# Altium PCB 主板-双BH(1).PcbDoc (part 6 of 13)
Units mm, origin at the board's own origin, x right, y up, seen from the top; angles counter-clockwise.
Board outline 97.69 x 103.45 mm, 2 copper layers (Top Layer, Bottom Layer); 78 components, 75 nets, 243 pads, 279 vias.
Unrouted connection lines stored in the file: 7.
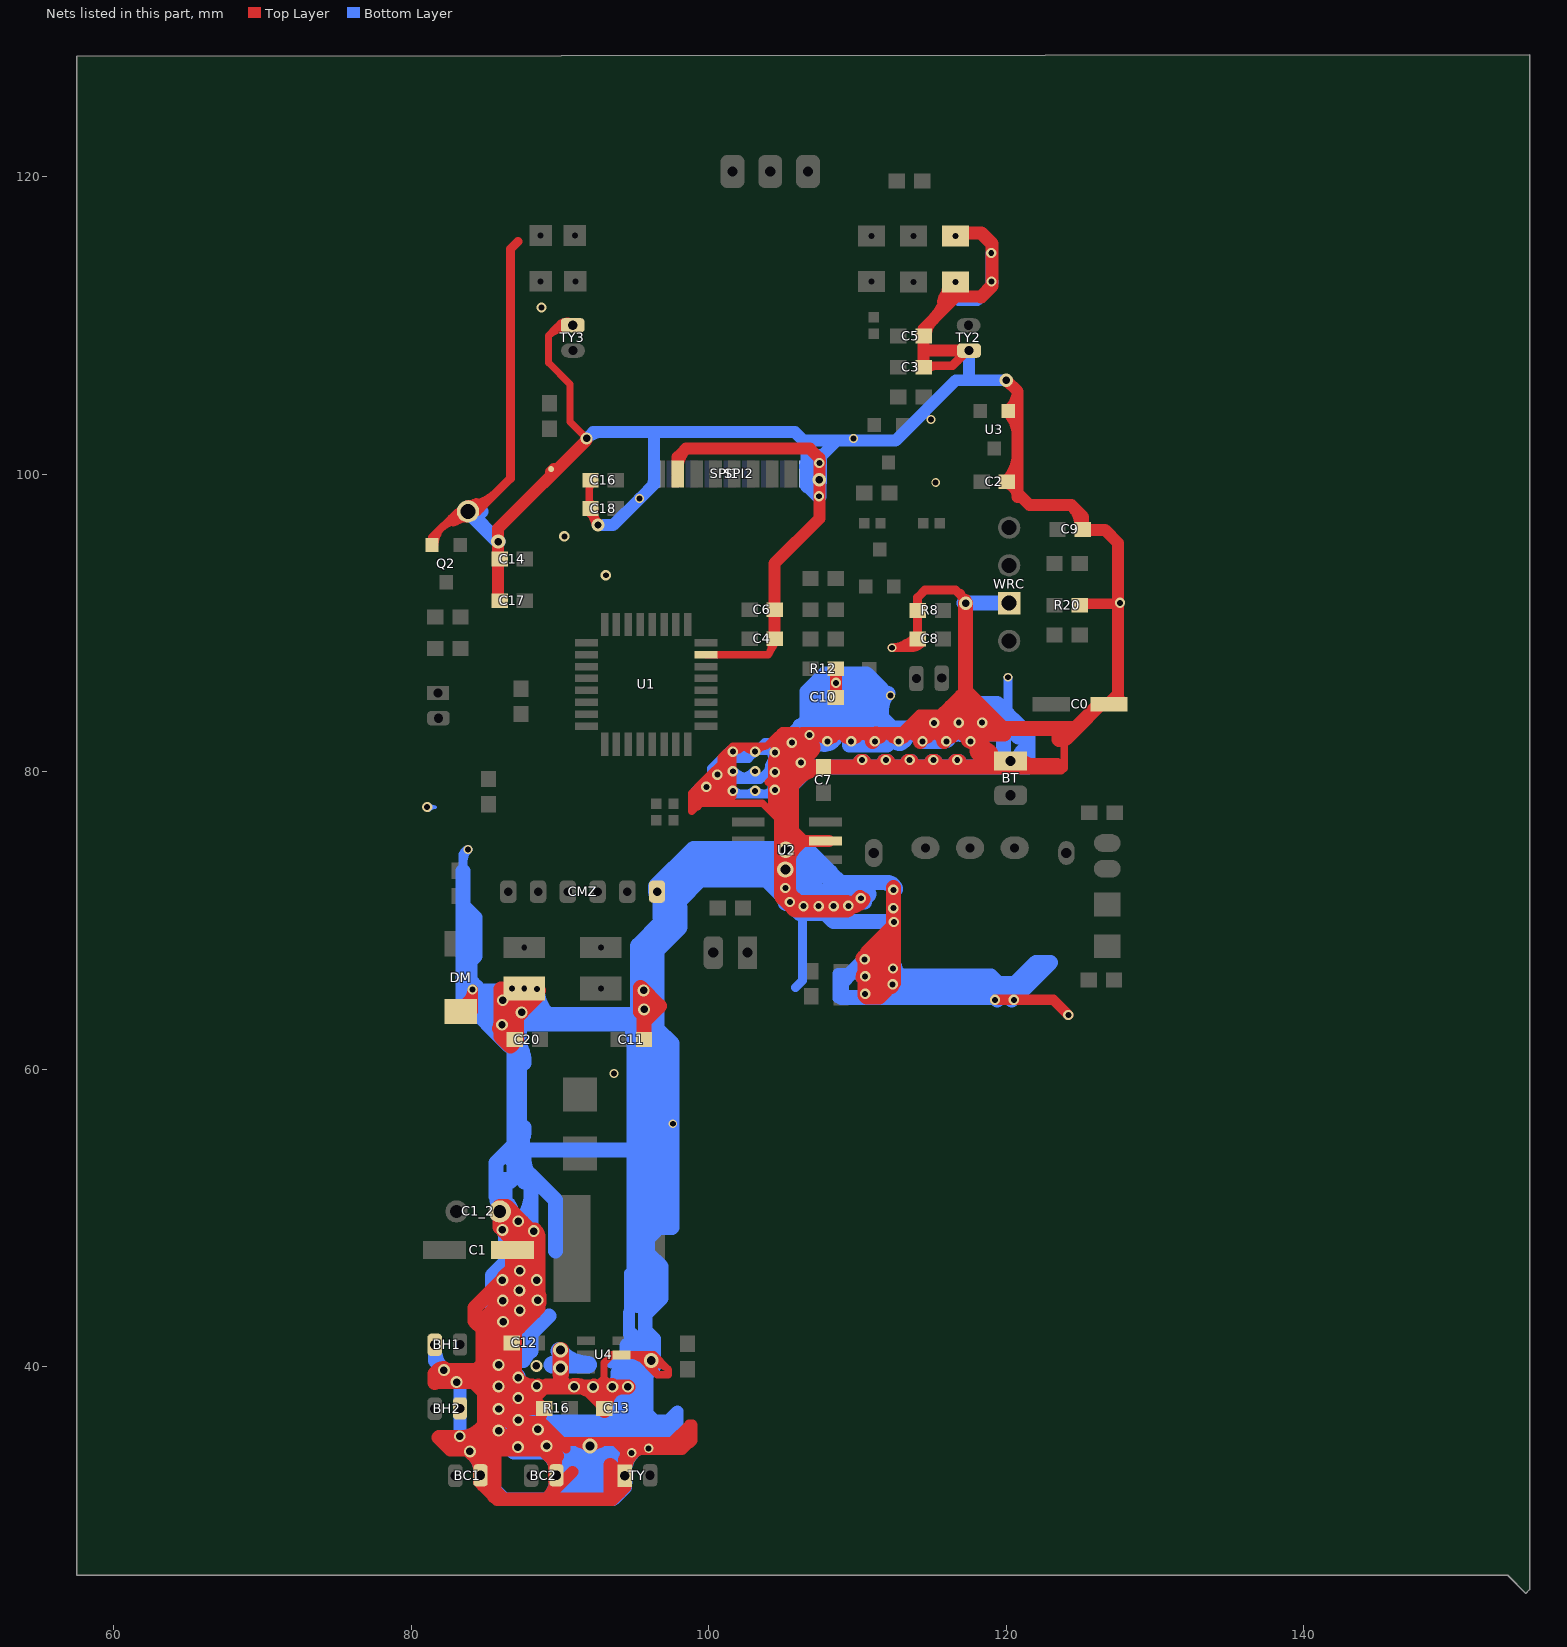
[diagram p6: the nets of this part, all layers, seen from the top]

## Via types
v1: diameter 0.7, hole 0.4, Top Layer to Bottom Layer, 108 vias
v2: diameter 0.68, hole 0.4, Top Layer to Bottom Layer, 87 vias
v3: diameter 0.8, hole 0.5, Top Layer to Bottom Layer, tented both sides, 33 vias
v4: diameter 0.6, hole 0.4, Top Layer to Bottom Layer, 12 vias
v5: diameter 0.9, hole 0.5, Top Layer to Bottom Layer, 8 vias
v6: diameter 0.8, hole 0.5, Top Layer to Bottom Layer, 6 vias
v7: diameter 1, hole 0.75, Top Layer to Bottom Layer, tented both sides, 5 vias
v8: diameter 3.4, hole 2.9, Top Layer to Bottom Layer, 4 vias
v9: diameter 1, hole 0.6, Top Layer to Bottom Layer, tented both sides, 3 vias
v10: diameter 1, hole 0.56, Top Layer to Bottom Layer, tented both sides, 2 vias
v11: diameter 1.1, hole 0.68, Top Layer to Bottom Layer, 2 vias
v12: diameter 0.8, hole 0.4, Top Layer to Bottom Layer, 2 vias
v13: diameter 0.65, hole 0.4, Top Layer to Bottom Layer, tented both sides, 2 vias
v14: diameter 1, hole 0.6, Top Layer to Bottom Layer, tented bottom, 1 vias
v15: diameter 0.7, hole 0.4, Top Layer to Bottom Layer, tented bottom, 1 vias
v16: diameter 0.95, hole 0.5, Top Layer to Bottom Layer, 1 vias
v17: diameter 0.64, hole 0.4, Top Layer to Bottom Layer, 1 vias
v18: diameter 0.62, hole 0.4, Top Layer to Bottom Layer, 1 vias

## Nets (pads, with @x,y where several pads share a name; then routed paths per layer and width w, separated by ;. In a path a pad name is that pad's centre, name@x,y a point inside that pad or via, vN(x,y) a via of type N, cw(c..) or ccw(c..) an arc to the next point about the centre after c; other vN are vias at no path point) (continued)
GND: (continued)
  Top Layer w0.5: 114.592,82.537 cw(c114.592,80.733) v1@115.903,81.973 ; 114.592,82.537 cw(c114.592,80.733) v1@115.903,81.973 ; 114.592,82.537 116.04,82.537 116.218,82.537 ; 114.63,83.718 cw(c114.63,83.285) v1@115.064,83.286 ; 114.63,83.718 cw(c114.63,83.285) v1@115.064,83.286 ; 114.63,83.718 cw(c114.63,83.285) v1@115.064,83.286 ; 114.63,83.718 114.884,83.718 ; 114.706,83.129 ccw(c114.631,83.696) v1@115.084,83.348 ; 114.706,83.129 ccw(c114.631,83.696) v1@115.084,83.348 ; 114.706,83.129 ccw(c114.631,83.696) v1@115.084,83.348 ; v1@115.164,83.187 cw(c115.164,82.615) 115.568,83.02 ; v1@115.164,83.187 cw(c115.164,82.615) 115.568,83.02 ; v1@115.164,83.187 cw(c115.164,82.615) 115.568,83.02 ; v1@115.25,83.337 ccw(c116.218,83.896) 116.218,82.779 ; v1@115.25,83.337 ccw(c116.218,83.896) 116.218,82.779 ; v1@115.25,83.337 ccw(c116.218,83.896) 116.218,82.779 ; 115.516,82.196 ccw(c115.801,82.69) v1@115.949,82.139 ; 115.516,82.196 ccw(c115.801,82.69) v1@115.949,82.139 ; 115.516,82.196 ccw(c115.801,82.69) v1@115.949,82.139 ; 115.52,82.208 ccw(c115.819,82.695) v1@115.952,82.139 ; 115.52,82.208 ccw(c115.819,82.695) v1@115.952,82.139 ; 115.52,82.208 ccw(c115.819,82.695) v1@115.952,82.139 ; v1@115.916,82.123 ccw(c115.485,82.715) 116.218,82.715 ; v1@115.916,82.123 ccw(c115.485,82.715) 116.218,82.715 ; v1@115.916,82.123 ccw(c115.485,82.715) 116.218,82.715 ; v1@115.94,82.136 ccw(c115.788,82.537) 116.218,82.537 ; v1@115.94,82.136 ccw(c115.788,82.537) 116.218,82.537 ; v1@115.94,82.136 ccw(c115.788,82.537) 116.218,82.537 ; v1@116.001,82.139 ccw(c116.149,82.69) 116.435,82.196 ; v1@116.001,82.139 ccw(c116.149,82.69) 116.435,82.196 ; v1@116.001,82.139 ccw(c116.149,82.69) 116.435,82.196 ; v1@116.001,82.139 ccw(c116.149,82.69) 116.435,82.196 ; v1@116.001,82.139 ccw(c116.149,82.69) 116.435,82.196 ; v1@116.001,82.139 ccw(c116.149,82.69) 116.435,82.196 ; v1@116.046,81.971 cw(c117.412,80.605) 117.412,82.537 ; v1@116.046,81.971 cw(c117.382,80.635) 117.382,82.525 ; v1@116.046,81.971 cw(c117.412,80.605) 117.412,82.537 ; v1@116.046,81.971 cw(c117.382,80.635) 117.382,82.525 ; v1@116.046,81.971 cw(c117.412,80.605) 117.412,82.537 ; v1@116.046,81.971 cw(c117.382,80.635) 117.382,82.525 ; v1@116.072,82.068 cw(c116.433,82.167) 116.142,82.402 ; v1@116.072,82.068 cw(c116.433,82.167) 116.142,82.402 ; v1@116.072,82.068 cw(c116.433,82.167) 116.142,82.402 ; v1@116.073,82.061 cw(c116.591,82.164) 116.218,82.537 ; v1@116.073,82.061 cw(c116.591,82.164) 116.218,82.537 ; v1@116.073,82.061 cw(c116.591,82.164) 116.218,82.537 ; v1@116.073,82.064 cw(c116.555,82.175) 116.205,82.525 ; v1@116.073,82.064 cw(c116.555,82.175) 116.205,82.525 ; v1@116.073,82.064 cw(c116.555,82.175) 116.205,82.525 ; 116.205,82.525 cw(c116.205,80.659) v1@117.531,81.972 ; 116.205,82.525 cw(c116.205,80.659) v1@117.531,81.972 ; 116.205,82.525 cw(c116.205,80.659) v1@117.531,81.972 ; 116.205,82.525 116.218,82.537 ; 116.218,82.537 cw(c116.218,80.73) v1@117.529,81.973 ; 116.218,82.537 cw(c116.218,80.73) v1@117.529,81.973 ; 116.218,82.537 cw(c116.218,80.73) v1@117.529,81.973 ; 116.218,82.537 116.218,82.715 ; 116.218,82.715 116.218,82.779 ; v1@116.808,83.212 cw(c116.769,82.642) 117.199,83.018 ; v1@116.808,83.212 cw(c116.769,82.642) 117.199,83.018 ; v1@116.808,83.212 cw(c116.769,82.642) 117.199,83.018 ; v1@116.904,83.356 ccw(c117.831,83.81) 117.831,82.779 ; v1@116.904,83.356 ccw(c117.831,83.81) 117.831,82.779 ; v1@116.904,83.356 ccw(c117.831,83.81) 117.831,82.779 ; 117.143,82.198 ccw(c117.431,82.691) v1@117.577,82.139 ; 117.143,82.198 ccw(c117.431,82.691) v1@117.577,82.139 ; 117.143,82.198 ccw(c117.431,82.691) v1@117.577,82.139 ; 117.147,82.208 ccw(c117.446,82.695) v1@117.579,82.139 ; 117.147,82.208 ccw(c117.446,82.695) v1@117.579,82.139 ; 117.147,82.208 ccw(c117.446,82.695) v1@117.579,82.139 ; BT.2@120.323,80.3 ccw(c120.9,80.877) 120.9,80.061 ; BT.2@120.323,80.3 ccw(c120.9,80.877) 120.9,80.061 ; BT.2@120.323,80.3 ccw(c120.9,80.877) 120.9,80.061 ; BT.2@120.676,80.653 ccw(c121.493,81.47) 121.493,80.315 ; BT.2@120.676,80.653 ccw(c122.107,82.084) 122.107,80.061 ; BT.2@120.676,80.653 ccw(c121.493,81.47) 121.493,80.315 ; BT.2@120.676,80.653 ccw(c122.107,82.084) 122.107,80.061 ; BT.2@120.676,80.653 ccw(c121.493,81.47) 121.493,80.315 ; BT.2@120.676,80.653 ccw(c122.107,82.084) 122.107,80.061 ; BT.2@120.707,80.816 cw(c121.029,80.082) 121.43,80.776 ; BT.2@120.707,80.816 cw(c121.029,80.082) 121.43,80.776 ; BT.2@120.707,80.816 cw(c121.029,80.082) 121.43,80.776 ; BT.2@120.851,80.338 cw(c121.015,79.723) BT.2@121.333,80.274 ; BT.2@120.851,80.338 cw(c121.015,79.723) BT.2@121.333,80.274 ; BT.2@120.851,80.338 cw(c121.015,79.723) BT.2@121.333,80.274 ; BT.2@120.908,80.358 cw(c121.522,78.961) 122.285,80.282 ; BT.2@120.908,80.358 cw(c121.522,78.961) 122.285,80.282 ; BT.2@120.908,80.358 cw(c121.522,78.961) 122.285,80.282 ; BT.2@121.009,80.422 cw(c121.512,79.842) 121.896,80.507 ; BT.2@121.009,80.422 cw(c121.512,79.842) 121.896,80.507 ; BT.2@121.009,80.422 cw(c121.512,79.842) 121.896,80.507 ; BT.2@121.03,80.441 cw(c121.606,79.865) 121.606,80.68 ; BT.2@121.03,80.441 cw(c121.606,79.865) 121.606,80.68 ; BT.2@121.03,80.441 cw(c121.606,79.865) 121.606,80.68 ; BT.2@121.03,81.007 ccw(c122.701,82.678) 122.701,80.315 ; BT.2@121.03,81.007 ccw(c121.819,81.796) 121.819,80.68 ; BT.2@121.03,81.007 ccw(c123.314,83.291) 123.314,80.061 ; BT.2@121.03,81.007 ccw(c122.701,82.678) 122.701,80.315 ; BT.2@121.03,81.007 ccw(c121.819,81.796) 121.819,80.68 ; BT.2@121.03,81.007 ccw(c123.314,83.291) 123.314,80.061 ; BT.2@121.03,81.007 ccw(c122.701,82.678) 122.701,80.315 ; BT.2@121.03,81.007 ccw(c121.819,81.796) 121.819,80.68 ; BT.2@121.03,81.007 ccw(c123.314,83.291) 123.314,80.061 ; BT.2@121.14,80.797 ccw(c122.139,80.982) 121.631,80.102 ; BT.2@121.14,80.797 ccw(c122.139,80.982) 121.631,80.102 ; BT.2@121.14,80.797 ccw(c122.139,80.982) 121.631,80.102 ; 123.685,80.48 123.698,80.493 123.698,80.467 123.685,80.48 ; 123.685,80.48 123.52,80.315 121.218,80.315 120.853,80.68 123.485,80.68 123.685,80.48 ; 124.117,82.639 124.384,82.906 126.024,84.546 126.303,84.546 C0.2@126.837,84.546 ; 125.499,84.021 cw(c126.163,83.357) C0.2@126.163,84.296 ; 125.499,84.021 cw(c126.163,83.357) C0.2@126.163,84.296 ; 125.499,84.021 cw(c126.163,83.357) C0.2@126.163,84.296 ; C0.2@126.837,84.546 C0.2@126.913,84.546 C0.2@126.913,84.622 ; C0.2@126.837,84.546 126.84,84.549 C0.2@126.913,84.622
  Top Layer w0.6: pad.4@83.82,97.511 84.455,97.511 86.665,99.72 86.665,115.138 87.173,115.646 ; 86.689,36.423 86.276,36.836 ; 86.69,36.423 87.148,36.423 v3(87.198,36.423) 87.546,36.423 87.774,36.195 ; v3@87.376,36.195 87.516,36.055 ; 88.033,35.369 87.566,35.369 ; R16.2@88.67,36.957 88.67,36.195 ; 88.773,34.29 89.51,33.553 ; 88.951,35.865 89.764,35.052 89.764,34.671 89.764,34.595 89.764,34.493 ; 88.951,36.195 90.165,34.98 ; 89.478,33.502 cw(c89.145,33.17) BC2.1@89.593,33.025 ; BC2.1@89.51,32.309 89.51,33.553 ; BC2.1@89.764,32.8 89.764,34.011 89.205,34.569 v3(89.103,34.671) 89.184,34.819 v3@89.15,34.819 ; BC2.1@89.84,32.774 89.84,34.671 90.037,34.868 ; 89.852,35.052 90.037,34.868 ; 96.698,34.544 96.749,34.595 97.003,34.849 ; 96.723,34.849 97.003,34.849 ; 114.046,90.092 114.046,91.719 114.554,92.227 116.586,92.227 v5@117.272,91.542 ; R8.2@114.05,91.232 114.05,88.955 113.436,88.341 v4(112.319,88.341) ; C3.1@114.45,107.3 116.382,107.3 117.413,108.331 TY2.2@117.501,108.419 ; 117.033,91.782 cw(c116.756,91.505) v5@117.129,91.384 ; pad.4@83.69,97.586 cw(c84.662,97.025) 84.371,98.108 ; pad.4@83.69,97.586 cw(c84.662,97.025) 84.371,98.108 ; pad.4@83.69,97.586 cw(c84.662,97.025) 84.371,98.108 ; pad.4@83.82,97.361 ccw(c83.82,98.531) 84.648,97.704 ; pad.4@83.82,97.361 ccw(c83.82,98.531) 84.648,97.704 ; pad.4@83.82,97.361 ccw(c83.82,98.531) 84.648,97.704 ; pad.4@83.82,97.961 ccw(c83.82,100.58) 85.672,98.728 ; pad.4@83.82,97.961 ccw(c83.82,100.58) 85.672,98.728 ; pad.4@83.82,97.961 ccw(c83.82,100.58) 85.672,98.728 ; v3@85.807,35.783 ccw(c85.157,36.433) 86.076,36.433 ; v3@85.807,35.783 ccw(c85.157,36.433) 86.076,36.433 ; v3@85.807,35.783 ccw(c85.157,36.433) 86.076,36.433 ; v3@85.807,37.089 cw(c85.157,36.44) 86.076,36.44 ; v3@85.807,37.089 cw(c85.157,36.44) 86.076,36.44 ; v3@85.807,37.089 cw(c85.157,36.44) 86.076,36.44 ; v3@85.832,35.802 ccw(c85.632,36.198) 86.076,36.198 ; v3@85.832,35.802 ccw(c85.632,36.198) 86.076,36.198 ; v3@85.832,35.802 ccw(c85.632,36.198) 86.076,36.198 ; v3@85.973,35.743 cw(c86.453,35.895) 86.017,36.147 ; v3@85.973,35.743 cw(c86.453,35.895) 86.017,36.147 ; v3@85.973,35.743 cw(c86.453,35.895) 86.017,36.147 ; v3@85.973,37.13 ccw(c86.453,36.978) 86.017,36.726 ; v3@85.973,37.13 ccw(c86.453,36.978) 86.017,36.726 ; v3@85.973,37.13 ccw(c86.453,36.978) 86.017,36.726 ; v3@85.974,37.186 ccw(c86.475,37.32) 86.216,36.871 ; v3@85.974,37.186 ccw(c86.475,37.32) 86.216,36.871 ; v3@85.974,37.186 ccw(c86.475,37.32) 86.216,36.871 ; v3@85.974,37.186 ccw(c86.475,37.32) 86.216,36.871 ; v3@85.974,37.186 ccw(c86.475,37.32) 86.216,36.871 ; v3@85.974,37.186 ccw(c86.475,37.32) 86.216,36.871 ; 86.076,36.198 86.076,37.036 86.276,36.836 ; 86.276,36.836 ccw(c87.054,37.615) v3@87.186,36.522 ; 86.276,36.836 ccw(c87.054,37.615) v3@87.186,36.522 ; 86.276,36.836 ccw(c87.054,37.615) v3@87.186,36.522 ; 86.652,36.055 ccw(c86.652,36.508) v3@87.099,36.438 ; 86.652,36.055 ccw(c86.652,36.508) v3@87.099,36.438 ; 86.652,36.055 ccw(c86.652,36.508) v3@87.099,36.438 ; 86.652,36.055 87.516,36.055 ; 86.742,36.585 cw(c86.661,36.02) v3@87.118,36.363 ; 86.742,36.585 cw(c86.661,36.02) v3@87.118,36.363 ; 86.742,36.585 cw(c86.661,36.02) v3@87.118,36.363 ; v3@87.13,36.349 cw(c86.364,35.524) 87.49,35.524 ; v3@87.13,36.349 cw(c86.364,35.524) 87.49,35.524 ; v3@87.13,36.349 cw(c86.364,35.524) 87.49,35.524 ; v3@87.15,36.335 cw(c86.833,35.759) 87.49,35.759 ; v3@87.15,36.335 cw(c86.833,35.759) 87.49,35.759 ; v3@87.15,36.335 cw(c86.833,35.759) 87.49,35.759 ; v3@87.198,36.323 cw(c87.198,35.242) 87.963,36.006 ; v3@87.198,36.323 cw(c87.198,35.242) 87.963,36.006 ; v3@87.198,36.323 cw(c87.198,35.242) 87.963,36.006 ; v3@87.229,36.327 cw(c87.393,35.814) 87.774,36.195 ; v3@87.229,36.327 cw(c87.393,35.814) 87.774,36.195 ; v3@87.229,36.327 cw(c87.393,35.814) 87.774,36.195 ; v3@87.229,36.327 cw(c87.393,35.814) 87.774,36.195 ; v3@87.229,36.327 cw(c87.393,35.814) 87.774,36.195 ; v3@87.229,36.327 cw(c87.393,35.814) 87.774,36.195 ; v3@87.285,36.473 ccw(c87.779,36.758) 87.632,36.206 ; v3@87.285,36.473 ccw(c87.779,36.758) 87.632,36.206 ; v3@87.285,36.473 ccw(c87.779,36.758) 87.632,36.206 ; v3@87.287,36.378 ccw(c87.957,36.04) 87.427,35.509 ; v3@87.287,36.378 ccw(c87.957,36.04) 87.427,35.509 ; v3@87.287,36.378 ccw(c87.957,36.04) 87.427,35.509 ; v3@87.296,36.4 ccw(c87.853,36.273) 87.369,35.969 ; v3@87.296,36.4 ccw(c87.853,36.273) 87.369,35.969 ; v3@87.296,36.4 ccw(c87.853,36.273) 87.369,35.969 ; 87.427,35.509 87.109,35.827 87.49,35.827 ; 87.427,35.509 87.49,35.446 ; 87.49,35.446 87.49,35.369 87.566,35.369 ; 87.49,35.446 87.566,35.369 ; 87.49,35.446 87.49,35.573 87.49,35.827 ; 87.49,35.827 87.744,35.827 ; 87.516,36.055 87.744,35.827 ; 87.567,35.369 ccw(c87.567,36.403) v3@88.435,35.843 ; 87.567,35.369 ccw(c87.567,36.403) v3@88.435,35.843 ; 87.567,35.369 ccw(c87.567,36.403) v3@88.435,35.843 ; 87.566,35.369 88.117,34.819 ; 87.744,35.827 87.933,35.827 88.117,35.642 88.117,34.819 ; 87.774,36.195 ccw(c88.513,36.935) v3@88.518,35.889 ; 87.774,36.195 ccw(c88.513,36.935) v3@88.518,35.889 ; 87.774,36.195 ccw(c88.513,36.935) v3@88.518,35.889 ; 87.774,36.195 v3@89.15,34.819 ; 88.084,36.003 cw(c87.939,35.45) v3@88.433,35.738 ; 88.084,36.003 cw(c87.939,35.45) v3@88.433,35.738 ; 88.084,36.003 cw(c87.939,35.45) v3@88.433,35.738 ; 88.102,35.541 cw(c88.486,35.118) v3@88.514,35.689 ; 88.102,35.541 cw(c88.486,35.118) v3@88.514,35.689 ; 88.102,35.541 cw(c88.486,35.118) v3@88.514,35.689 ; 88.117,34.739 cw(c89.367,34.739) v3@88.582,35.711 ; 88.117,34.739 cw(c89.367,34.739) v3@88.582,35.711 ; 88.117,34.739 cw(c89.367,34.739) v3@88.582,35.711 ; 88.117,34.819 v3@89.15,34.819 ; 88.318,35.348 ccw(c87.856,35.684) v3@88.42,35.773 ; 88.318,35.348 ccw(c87.856,35.684) v3@88.42,35.773 ; 88.318,35.348 ccw(c87.856,35.684) v3@88.42,35.773 ; v3@88.448,35.859 ccw(c87.913,36.395) 88.67,36.395 ; v3@88.448,35.859 ccw(c87.913,36.395) 88.67,36.395 ; v3@88.448,35.859 ccw(c87.913,36.395) 88.67,36.395 ; v3@88.469,35.702 cw(c88.183,35.207) 88.735,35.355 ; v3@88.469,35.702 cw(c88.183,35.207) 88.735,35.355 ; v3@88.469,35.702 cw(c88.183,35.207) 88.735,35.355 ; v3@88.474,35.878 ccw(c88.316,36.195) 88.67,36.195 ; v3@88.474,35.878 ccw(c88.316,36.195) 88.67,36.195 ; v3@88.474,35.878 ccw(c88.316,36.195) 88.67,36.195 ; 88.505,34.819 cw(c88.505,34.073) v3@89.032,34.6 ; 88.505,34.819 cw(c88.505,34.073) v3@89.032,34.6 ; 88.505,34.819 cw(c88.505,34.073) v3@89.032,34.6 ; v3@88.519,35.689 cw(c88.519,34.221) 89.557,35.259 ; v3@88.519,35.689 cw(c88.519,33.424) 90.121,35.025 ; v3@88.519,35.689 cw(c88.519,34.221) 89.557,35.259 ; v3@88.519,35.689 cw(c88.519,33.424) 90.121,35.025 ; v3@88.519,35.689 cw(c88.519,34.221) 89.557,35.259 ; v3@88.519,35.689 cw(c88.519,33.424) 90.121,35.025 ; v3@88.606,35.839 ccw(c89.1,36.124) 88.952,35.572 ; v3@88.606,35.839 ccw(c89.1,36.124) 88.952,35.572 ; v3@88.606,35.839 ccw(c89.1,36.124) 88.952,35.572 ; v3@88.606,35.839 ccw(c89.1,36.124) 88.952,35.572 ; v3@88.606,35.839 ccw(c89.1,36.124) 88.952,35.572 ; v3@88.606,35.839 ccw(c89.1,36.124) 88.952,35.572 ; v3@88.619,35.789 ccw(c89.679,35.789) 88.929,35.039 ; v3@88.619,35.789 ccw(c89.679,35.789) 88.929,35.039 ; v3@88.619,35.789 ccw(c89.679,35.789) 88.929,35.039 ; 88.67,36.169 cw(c89.921,36.169) R16.2@89.041,37.058 ; 88.67,36.169 cw(c89.921,36.169) R16.2@89.041,37.058 ; 88.67,36.169 cw(c89.921,36.169) R16.2@89.041,37.058 ; R16.2@88.74,37.079 cw(c88.39,36.815) 88.769,36.593 ; R16.2@88.74,37.079 cw(c88.39,36.815) 88.769,36.593 ; R16.2@88.74,37.079 cw(c88.39,36.815) 88.769,36.593 ; 88.795,35.174 cw(c88.293,34.671) v3@89.003,34.671 ; 88.795,35.174 cw(c88.293,34.671) v3@89.003,34.671 ; 88.795,35.174 cw(c88.293,34.671) v3@89.003,34.671 ; 88.887,35.104 ccw(c89.439,35.252) v3@89.153,34.758 ; 88.887,35.104 ccw(c89.439,35.252) v3@89.153,34.758 ; 88.887,35.104 ccw(c89.439,35.252) v3@89.153,34.758 ; v3@89.034,34.598 cw(c88.642,34.184) 89.213,34.199 ; v3@89.034,34.598 cw(c88.642,34.184) 89.213,34.199 ; v3@89.034,34.598 cw(c88.642,34.184) 89.213,34.199 ; v3@89.15,34.819 89.298,34.671 89.399,34.569 89.475,34.493 89.764,34.493 ; v3@89.175,34.741 ccw(c89.764,35.317) 89.764,34.493 ; v3@89.175,34.741 ccw(c89.764,35.317) 89.764,34.493 ; v3@89.175,34.741 ccw(c89.764,35.317) 89.764,34.493 ; v3@89.2,34.648 ccw(c90.333,34.377) 89.51,33.553 ; v3@89.2,34.648 ccw(c90.333,34.377) 89.51,33.553 ; v3@89.2,34.648 ccw(c90.333,34.377) 89.51,33.553 ; 89.224,33.839 cw(c88.355,32.97) BC2.1@89.584,32.97 ; 89.224,33.839 cw(c88.355,32.97) BC2.1@89.584,32.97 ; 89.224,33.839 cw(c88.355,32.97) BC2.1@89.584,32.97 ; 89.375,33.75 ccw(c90.368,34.016) BC2.1@89.854,33.126 ; 89.375,33.75 ccw(c90.368,34.016) BC2.1@89.854,33.126 ; 89.375,33.75 ccw(c90.368,34.016) BC2.1@89.854,33.126 ; 89.51,33.553 cw(c89.19,33.234) BC2.1@89.6,33.045 ; 89.51,33.553 ccw(c89.938,33.553) BC2.1@89.816,33.142 ; 89.51,33.553 cw(c89.19,33.234) BC2.1@89.6,33.045 ; 89.51,33.553 ccw(c89.938,33.553) BC2.1@89.816,33.142 ; 89.51,33.553 cw(c89.19,33.234) BC2.1@89.6,33.045 ; 89.51,33.553 ccw(c89.938,33.553) BC2.1@89.816,33.142 ; BC2.1@89.637,33.097 ccw(c89.146,33.588) 89.84,33.588 ; BC2.1@89.637,33.097 ccw(c89.146,33.588) 89.84,33.588 ; BC2.1@89.637,33.097 ccw(c89.146,33.588) 89.84,33.588 ; 90.037,34.868 90.424,34.48 90.424,34.722 90.165,34.98 ; 90.037,34.868 90.149,34.98 90.165,34.98 ; 90.165,34.98 93.696,34.98 ; 90.794,34.98 cw(c90.794,33.441) v9@91.883,34.53 ; 90.794,34.98 cw(c90.794,33.441) v9@91.883,34.53 ; 90.794,34.98 cw(c90.794,33.441) v9@91.883,34.53 ; 91.289,34.872 ccw(c91.633,35.467) v9@91.936,34.851 ; 91.289,34.872 ccw(c91.633,35.467) v9@91.936,34.851 ; 91.289,34.872 ccw(c91.633,35.467) v9@91.936,34.851 ; v9@92.112,34.851 ccw(c92.415,35.467) 92.759,34.872 ; v9@92.112,34.851 ccw(c92.415,35.467) 92.759,34.872 ; v9@92.112,34.851 ccw(c92.415,35.467) 92.759,34.872 ; v9@92.166,34.53 cw(c93.254,33.441) 93.254,34.98 ; v9@92.166,34.53 cw(c93.254,33.441) 93.254,34.98 ; v9@92.166,34.53 cw(c93.254,33.441) 93.254,34.98 ; 93.696,34.98 94.259,34.417 ; 93.696,34.98 97.134,34.98 ; 94.168,34.508 ccw(c94.818,35.158) v13@94.818,34.239 ; 94.168,34.508 ccw(c94.818,35.158) v13@94.818,34.239 ; 94.168,34.508 ccw(c94.818,35.158) v13@94.818,34.239 ; 94.259,34.417 ccw(c94.711,34.868) v13@94.814,34.238 ; 94.259,34.417 ccw(c94.711,34.868) v13@94.814,34.238 ; 94.259,34.417 ccw(c94.711,34.868) v13@94.814,34.238 ; 94.786,34.98 cw(c94.786,33.343) v13@95.944,34.501 ; 94.786,34.98 cw(c94.786,33.343) v13@95.944,34.501 ; 94.786,34.98 cw(c94.786,33.343) v13@95.944,34.501 ; v13@95.979,34.501 cw(c97.134,33.349) 97.134,34.98 ; v13@95.979,34.501 cw(c97.134,33.349) 97.134,34.98 ; v13@95.979,34.501 cw(c97.134,33.349) 97.134,34.98 ; 97.003,34.849 98.044,34.849 ; 97.003,34.849 97.134,34.98 ; 97.134,34.98 97.515,34.98 98.679,36.144 98.908,36.144 98.958,36.093 98.958,35.763 ; 98.044,34.849 98.171,34.849 ; 98.044,34.849 98.171,34.976 ; 98.171,34.849 98.501,34.849 98.527,34.849 98.781,34.849 98.958,35.027 98.958,35.763 ; 98.171,34.849 98.171,34.976 ; 98.171,34.976 98.958,35.763 ; v4(112.319,88.341) ccw(c112.319,90.324) C8.1@113.846,89.06 ; v4(112.319,88.341) ccw(c112.319,90.324) C8.1@113.846,89.06 ; v4(112.319,88.341) ccw(c112.319,90.324) C8.1@113.846,89.06 ; 113.114,88.54 cw(c113.776,87.608) C8.1@113.967,88.735 ; 113.114,88.54 cw(c113.776,87.608) C8.1@113.967,88.735 ; 113.114,88.54 cw(c113.776,87.608) C8.1@113.967,88.735 ; 113.594,88.341 ccw(c113.594,89.268) C8.1@114.308,88.677 ; 113.594,88.341 ccw(c113.594,89.268) C8.1@114.308,88.677 ; 113.594,88.341 ccw(c113.594,89.268) C8.1@114.308,88.677 ; C8.1@113.639,88.544 ccw(c113.252,88.932) C8.1@113.8,88.932 ; C8.1@113.639,88.544 ccw(c113.252,88.932) C8.1@113.8,88.932 ; C8.1@113.639,88.544 ccw(c113.252,88.932) C8.1@113.8,88.932 ; C3.1@114.641,107.059 cw(c115.224,106.476) 115.224,107.3 ; C3.1@114.641,107.059 cw(c115.224,106.476) 115.224,107.3 ; C3.1@114.641,107.059 cw(c115.224,106.476) 115.224,107.3 ; 116.718,107.636 ccw(c116.036,108.319) TY2.2@117.001,108.319 ; 116.718,107.636 ccw(c116.036,108.319) TY2.2@117.001,108.319 ; 116.718,107.636 ccw(c116.036,108.319) TY2.2@117.001,108.319 ; 116.872,91.941 cw(c116.269,91.338) v5@117.122,91.338 ; 116.872,91.941 cw(c116.269,91.338) v5@117.122,91.338 ; 116.872,91.941 cw(c116.269,91.338) v5@117.122,91.338 ; 116.948,91.989 ccw(c117.775,92.21) v5@117.347,91.468 ; 116.948,91.989 ccw(c117.775,92.21) v5@117.347,91.468 ; 116.948,91.989 ccw(c117.775,92.21) v5@117.347,91.468
  Top Layer w0.7: DM.1@83.34,63.885 84.125,63.885 v2(84.125,65.354) ; v1(119.253,64.668) v1(120.523,64.668) 123.165,64.668 v1(124.181,63.652) ; R20.1@125.15,91.308 v2@127.432,91.308 ; DM.1@83.422,64.356 ccw(c83.064,65.354) v2(84.125,65.354) ; DM.1@83.422,64.356 ccw(c83.064,65.354) v2(84.125,65.354) ; DM.1@83.422,64.356 ccw(c83.064,65.354) v2(84.125,65.354) ; R20.1@125.106,91.094 cw(c125.622,90.578) 125.622,91.308 ; R20.1@125.106,91.094 cw(c125.622,90.578) 125.622,91.308 ; R20.1@125.106,91.094 cw(c125.622,90.578) 125.622,91.308
  Top Layer w0.8: 85.581,31.783 86.274,31.09 ; C17.2@85.847,91.465 85.847,96.363 v6@91.796,102.311 ; 87.071,63.378 88.519,64.825 pad.0@88.519,65.1 ; pad.0@87.6,65.406 87.602,65.406 87.617,65.406 87.617,65.415 87.617,65.431 pad.0@87.617,65.457 ; 89.002,31.09 90.856,32.944 ; 89.306,38.643 89.756,38.644 ; v6(90.957,38.659) 90.957,38.645 89.756,38.644 ; v6(92.227,38.647) 92.964,38.648 92.989,38.648 v6@93.523,38.649 ; SPI1.7@97.917,100.032 97.917,101.16 98.484,101.727 106.807,101.727 107.442,101.092 v1(107.442,100.762) v5(107.442,99.644) 107.442,97.028 104.419,94.005 C4.2@104.419,88.951 ; 105.156,76.86 v11@105.156,73.575 ; v11@105.181,72.923 105.181,73.304 v11@105.156,73.33 ; 105.588,76.124 106.35,75.362 ; 106.07,75.362 U2.3@108.077,75.362 ; C10.2@108.55,85 R12.1@108.55,86.932 ; C3.1@114.45,107.3 114.45,109.776 116.6,111.926 pad.0@116.6,112.932 ; 114.503,108.331 117.413,108.331 TY2.2@117.475,108.331 ; 115.923,112.045 ccw(c115.369,112.599) pad.0@116.115,112.84 ; 116.756,111.946 118.321,111.946 ; v5(117.272,91.338) v5@117.272,91.542 ; v5(120.015,106.324) 120.766,105.573 ; C0.2@126.924,84.633 127.533,85.242 127.533,95.377 126.644,96.266 125.184,96.266 125.184,97.142 124.384,97.942 ; 87.681,38.608 cw(c88.128,38.161) v3(88.443,38.71) ; 87.681,38.608 cw(c88.128,38.161) v3(88.443,38.71) ; 87.681,38.608 cw(c88.128,38.161) v3(88.443,38.71) ; 87.681,38.608 87.716,38.643 ; 87.716,38.643 cw(c88.119,38.24) v3(88.443,38.71) ; 87.716,38.643 cw(c88.119,38.24) v3(88.443,38.71) ; 87.716,38.643 cw(c88.119,38.24) v3(88.443,38.71) ; 87.716,38.643 88.91,38.643 89.078,38.811 ; 88.064,64.371 ccw(c87.03,65.405) pad.0@88.493,65.405 ; 88.064,64.371 ccw(c87.03,65.405) pad.0@88.493,65.405 ; 88.064,64.371 ccw(c87.03,65.405) pad.0@88.493,65.405 ; 88.316,37.922 ccw(c87.834,38.404) v3(88.443,38.71) ; 88.316,37.922 ccw(c87.834,38.404) v3(88.443,38.71) ; 88.316,37.922 ccw(c87.834,38.404) v3(88.443,38.71) ; 88.316,37.922 89.037,38.644 89.756,38.644 ; v3(88.443,38.71) ccw(c88.69,39.199) 89.078,38.811 ; v3(88.443,38.71) ccw(c88.69,39.199) 89.078,38.811 ; v3(88.443,38.71) ccw(c88.69,39.199) 89.078,38.811 ; 89.078,38.811 89.924,38.811 89.762,38.649 89.756,38.644 ; 89.219,31.307 ccw(c88.095,32.43) BC2.1@89.684,32.43 ; 89.219,31.307 ccw(c88.095,32.43) BC2.1@89.684,32.43 ; 89.219,31.307 ccw(c88.095,32.43) BC2.1@89.684,32.43 ; 89.408,100.155 ccw(c89.408,100.715) 89.804,100.319 ; 89.408,100.155 ccw(c89.408,100.715) 89.804,100.319 ; 89.408,100.155 ccw(c89.408,100.715) 89.804,100.319 ; 89.444,99.96 ccw(c89.048,100.355) 89.608,100.355 ; 89.444,99.96 ccw(c89.048,100.355) 89.608,100.355 ; 89.444,99.96 ccw(c89.048,100.355) 89.608,100.355 ; SPI1.7@97.942,100.507 cw(c99.58,100.507) 98.422,101.665 ; SPI1.7@97.942,100.507 cw(c99.58,100.507) 98.422,101.665 ; SPI1.7@97.942,100.507 cw(c99.58,100.507) 98.422,101.665 ; v11@105.05,73.537 ccw(c104.403,74.185) 105.318,74.185 ; v11@105.05,73.537 ccw(c104.403,74.185) 105.318,74.185 ; v11@105.05,73.537 ccw(c104.403,74.185) 105.318,74.185 ; v11@105.075,74.646 cw(c104.489,74.06) 105.318,74.06 ; v11@105.075,74.646 cw(c104.489,74.06) 105.318,74.06 ; v11@105.075,74.646 cw(c104.489,74.06) 105.318,74.06 ; v11@105.081,73.561 ccw(c104.653,74.303) 105.48,74.082 ; v11@105.081,73.561 ccw(c104.653,74.303) 105.48,74.082 ; v11@105.081,73.561 ccw(c104.653,74.303) 105.48,74.082 ; 105.156,71.704 ccw(c105.744,71.704) v1@105.435,71.204 ; 105.156,71.704 ccw(c105.744,71.704) v1@105.435,71.204 ; 105.156,71.704 ccw(c105.744,71.704) v1@105.435,71.204 ; 105.156,71.704 105.156,71.933 v1(105.156,72.187) v11@105.156,73.33 ; v1@105.156,71.862 ccw(c106.076,71.862) v1@105.425,71.212 ; v1@105.156,71.862 ccw(c106.076,71.862) v1@105.425,71.212 ; v1@105.156,71.862 ccw(c106.076,71.862) v1@105.425,71.212 ; v11@105.156,73.33 v11(105.156,73.431) v11@105.156,73.575 ; v11@105.156,73.33 105.14,73.429 105.131,73.483 105.115,73.575 105.131,73.575 v11@105.156,73.575 ; v11@105.156,73.575 105.318,73.575 v11@105.318,74.33 ; v11@105.186,74.902 ccw(c105.238,76.473) 106.35,75.362 ; v11@105.186,74.902 ccw(c105.238,76.473) 106.35,75.362 ; v11@105.186,74.902 ccw(c105.238,76.473) 106.35,75.362 ; v11@105.251,74.885 ccw(c105.533,75.42) 106.017,75.056 ; v11@105.251,74.885 ccw(c105.533,75.42) 106.017,75.056 ; v11@105.251,74.885 ccw(c105.533,75.42) 106.017,75.056 ; v11@105.251,74.885 ccw(c105.533,75.42) 106.017,75.056 ; v11@105.251,74.885 ccw(c105.533,75.42) 106.017,75.056 ; v11@105.251,74.885 ccw(c105.533,75.42) 106.017,75.056 ; v11@105.273,73.525 cw(c105.746,73.902) v11@105.318,74.33 ; v11@105.273,73.525 cw(c105.746,73.902) v11@105.318,74.33 ; v11@105.273,73.525 cw(c105.746,73.902) v11@105.318,74.33 ; v11@105.306,73.431 cw(c107.446,73.431) 105.933,74.945 ; v11@105.306,73.431 cw(c107.446,73.431) 105.933,74.945 ; v11@105.306,73.431 cw(c107.446,73.431) 105.933,74.945 ; v11@105.309,74.673 cw(c106.036,74.22) 105.842,75.055 ; v11@105.309,74.673 cw(c106.036,74.22) 105.842,75.055 ; v11@105.309,74.673 cw(c106.036,74.22) 105.842,75.055 ; v11@105.318,74.33 106.35,75.362 ; 107.294,101.24 cw(c106.816,100.762) v1@107.492,100.762 ; 107.294,101.24 cw(c106.816,100.762) v1@107.492,100.762 ; 107.294,101.24 cw(c106.816,100.762) v1@107.492,100.762 ; C5.1@114.6,109.3 cw(c116.112,109.3) 115.043,110.369 ; C5.1@114.6,109.3 cw(c116.112,109.3) 115.043,110.369 ; C5.1@114.6,109.3 cw(c116.112,109.3) 115.043,110.369 ; 115.036,110.362 ccw(c112.466,112.932) pad.0@116.1,112.932 ; 115.036,110.362 ccw(c112.466,112.932) pad.0@116.1,112.932 ; 115.036,110.362 ccw(c112.466,112.932) pad.0@116.1,112.932 ; 115.752,111.631 cw(c117.407,111.188) pad.0@116.55,112.672 ; 115.752,111.631 cw(c117.407,111.188) pad.0@116.55,112.672 ; 115.752,111.631 cw(c117.407,111.188) pad.0@116.55,112.672 ; pad.0@116.388,112.72 cw(c115.876,112.208) 116.6,112.208 ; pad.0@116.388,112.72 cw(c115.876,112.208) 116.6,112.208 ; pad.0@116.388,112.72 cw(c115.876,112.208) 116.6,112.208 ; 116.401,111.728 ccw(c115.197,112.932) pad.0@116.9,112.932 ; 116.401,111.728 ccw(c115.197,112.932) pad.0@116.9,112.932 ; 116.401,111.728 ccw(c115.197,112.932) pad.0@116.9,112.932 ; 116.6,112.208 cw(c117.324,112.208) pad.0@116.812,112.72 ; 116.6,112.208 cw(c117.324,112.208) pad.0@116.812,112.72 ; 116.6,112.208 cw(c117.324,112.208) pad.0@116.812,112.72 ; 118.165,111.946 ccw(c118.165,112.467) 118.533,112.099 ; 118.165,111.946 ccw(c118.165,112.467) 118.533,112.099 ; 118.165,111.946 ccw(c118.165,112.467) 118.533,112.099 ; C2.1@120.029,99.571 ccw(c118.25,101.35) 120.766,101.35 ; C2.1@120.029,99.571 ccw(c118.25,101.35) 120.766,101.35 ; C2.1@120.029,99.571 ccw(c118.25,101.35) 120.766,101.35 ; C2.1@120.073,99.404 cw(c119.817,98.489) 120.766,98.489 ; C2.1@120.073,99.404 cw(c119.817,98.489) 120.766,98.489 ; C2.1@120.073,99.404 cw(c119.817,98.489) 120.766,98.489 ; U3.1@120.115,104.19 cw(c118.541,102.616) 120.766,102.616 ; U3.1@120.115,104.19 cw(c118.541,102.616) 120.766,102.616 ; U3.1@120.115,104.19 cw(c118.541,102.616) 120.766,102.616 ; U3.1@120.121,104.316 ccw(c119.219,105.573) 120.766,105.573 ; U3.1@120.121,104.316 ccw(c119.219,105.573) 120.766,105.573 ; U3.1@120.121,104.316 ccw(c119.219,105.573) 120.766,105.573 ; C2.1@120.595,99.005 ccw(c120.181,99.419) 120.766,99.419 ; C2.1@120.595,99.005 ccw(c120.181,99.419) 120.766,99.419 ; C2.1@120.595,99.005 ccw(c120.181,99.419) 120.766,99.419 ; 120.766,105.573 120.766,98.74 121.564,97.942 124.384,97.942 ; 124.384,97.942 cw(c122.885,96.443) C9.1@125,96.307 ; 124.384,97.942 cw(c122.885,96.443) C9.1@125,96.307 ; 124.384,97.942 cw(c122.885,96.443) C9.1@125,96.307 ; 127.533,85.1 ccw(c128.217,85.1) C0.2@127.734,84.617 ; 127.533,85.1 ccw(c128.217,85.1) C0.2@127.734,84.617 ; 127.533,85.1 ccw(c128.217,85.1) C0.2@127.734,84.617 ; 127.533,85.1 ccw(c128.217,85.1) C0.2@127.734,84.617 ; 127.533,85.1 ccw(c128.217,85.1) C0.2@127.734,84.617 ; 127.533,85.1 ccw(c128.217,85.1) C0.2@127.734,84.617
  Top Layer w0.9: 84.607,33.68 84.607,32.258 85.776,31.09 86.274,31.09 89.002,31.09 93.523,31.09 94.364,31.931 TY.2@94.364,32.032 ; 93.745,32.055 TY.2@94.364,32.674 ; 98.501,34.849 98.247,34.595 96.749,34.595 95.301,34.595 ; 98.527,34.849 98.196,34.519 v13(95.961,34.519) 95.225,34.519 ; pad.0@116.865,116.23 118.313,116.23 119.05,115.494 119.05,112.674 118.321,111.946 ; BC1.1@84.694,32.43 ccw(c85.318,32.43) BC1.1@84.877,31.989 ; BC1.1@84.694,32.43 ccw(c85.318,32.43) BC1.1@84.877,31.989 ; BC1.1@84.694,32.43 ccw(c85.318,32.43) BC1.1@84.877,31.989 ; 93.44,33.357 ccw(c94.364,34.281) TY.2@94.364,32.974 ; 93.44,33.357 ccw(c94.364,34.281) TY.2@94.364,32.974 ; 93.44,33.357 ccw(c94.364,34.281) TY.2@94.364,32.974 ; 93.852,32.162 cw(c94.364,31.65) TY.2@94.364,32.374 ; 93.852,32.162 cw(c94.364,31.65) TY.2@94.364,32.374 ; 93.852,32.162 cw(c94.364,31.65) TY.2@94.364,32.374 ; 93.978,31.545 ccw(c93.119,32.404) TY.2@94.334,32.404 ; 93.978,31.545 ccw(c93.119,32.404) TY.2@94.334,32.404 ; 93.978,31.545 ccw(c93.119,32.404) TY.2@94.334,32.404 ; 94.05,31.718 ccw(c93.364,32.404) TY.2@94.334,32.404 ; 94.05,31.718 ccw(c93.364,32.404) TY.2@94.334,32.404 ; 94.05,31.718 ccw(c93.364,32.404) TY.2@94.334,32.404 ; 94.361,33.492 cw(c95.437,33.492) v13@94.737,34.309 ; 94.361,33.492 cw(c95.437,33.492) v13@94.737,34.309 ; 94.361,33.492 cw(c95.437,33.492) v13@94.737,34.309 ; 94.361,33.567 cw(c95.281,33.567) v13@94.745,34.315 ; 94.361,33.567 cw(c95.281,33.567) v13@94.745,34.315 ; 94.361,33.567 cw(c95.281,33.567) v13@94.745,34.315 ; TY.2@94.364,32.032 TY.2@94.364,32.674 ; TY.2@94.364,32.032 93.472,31.14 93.37,31.242 93.37,33.426 94.123,32.674 TY.2@94.364,32.674 ; TY.2@94.364,32.674 94.364,33.658 ; TY.2@94.364,33.419 cw(c95.613,33.419) v13@94.73,34.302 ; TY.2@94.364,33.419 cw(c95.613,33.419) v13@94.73,34.302 ; TY.2@94.364,33.419 cw(c95.613,33.419) v13@94.73,34.302 ; 94.364,33.496 cw(c95.436,33.496) v13@94.737,34.309 ; 94.364,33.496 cw(c95.436,33.496) v13@94.737,34.309 ; 94.364,33.496 cw(c95.436,33.496) v13@94.737,34.309 ; 94.364,33.496 cw(c95.436,33.496) v13@94.737,34.309 ; 94.364,33.496 cw(c95.436,33.496) v13@94.737,34.309 ; 94.364,33.496 cw(c95.436,33.496) v13@94.737,34.309 ; 94.364,33.571 cw(c95.28,33.571) v13@94.745,34.315 ; 94.364,33.571 cw(c95.28,33.571) v13@94.745,34.315 ; 94.364,33.571 cw(c95.28,33.571) v13@94.745,34.315 ; 94.364,33.658 v13@94.818,34.112 ; 94.364,33.658 94.361,33.655 94.361,33.757 94.364,33.76 ; 94.364,33.658 94.364,33.76 ; 94.364,33.76 v13(94.818,34.214) ; TY.2@94.394,32.947 cw(c95.856,33.074) v13@94.818,34.112 ; TY.2@94.394,32.947 cw(c95.856,33.074) v13@94.818,34.112 ; TY.2@94.394,32.947 cw(c95.856,33.074) v13@94.818,34.112 ; TY.2@94.394,32.948 cw(c95.877,33.155) v13(94.818,34.214) ; TY.2@94.394,32.948 cw(c95.877,33.155) v13(94.818,34.214) ; TY.2@94.394,32.948 cw(c95.877,33.155) v13(94.818,34.214) ; v13@94.715,34.284 cw(c95.301,33.887) 95.301,34.595 ; v13@94.715,34.284 cw(c95.301,33.887) 95.301,34.595 ; v13@94.715,34.284 cw(c95.301,33.887) 95.301,34.595 ; v13@94.726,34.298 cw(c95.225,33.844) 95.225,34.519 ; v13@94.726,34.298 cw(c95.225,33.844) 95.225,34.519 ; v13@94.726,34.298 cw(c95.225,33.844) 95.225,34.519 ; v13@94.726,34.298 cw(c95.225,33.844) 95.225,34.519 ; v13@94.726,34.298 cw(c95.225,33.844) 95.225,34.519 ; v13@94.726,34.298 cw(c95.225,33.844) 95.225,34.519 ; v13@94.73,34.302 cw(c95.252,33.78) 95.252,34.519 ; v13@94.73,34.302 cw(c95.436,33.596) 95.436,34.595 ; v13@94.73,34.302 cw(c95.252,33.78) 95.252,34.519 ; v13@94.73,34.302 cw(c95.436,33.596) 95.436,34.595 ; v13@94.73,34.302 cw(c95.252,33.78) 95.252,34.519 ; v13@94.73,34.302 cw(c95.436,33.596) 95.436,34.595 ; v13@94.818,34.112 v13(94.818,34.214) ; v13@94.818,34.112 95.225,34.519 ; v13(94.818,34.214) 95.123,34.519 95.225,34.519 ; v13@94.917,34.211 cw(c95.961,33.167) v13@95.961,34.644 ; v13@94.917,34.211 cw(c95.961,33.167) v13@95.961,34.644 ; v13@94.917,34.211 cw(c95.961,33.167) v13@95.961,34.644 ; 95.225,34.519 cw(c95.695,34.048) v13@96.023,34.627 ; 95.225,34.519 cw(c95.695,34.048) v13@96.023,34.627 ; 95.225,34.519 cw(c95.695,34.048) v13@96.023,34.627 ; 95.225,34.519 cw(c95.695,34.048) v13@96.023,34.627 ; 95.225,34.519 cw(c95.695,34.048) v13@96.023,34.627 ; 95.225,34.519 cw(c95.695,34.048) v13@96.023,34.627 ; 95.225,34.519 95.301,34.595 ; 95.301,34.595 cw(c95.682,34.214) v13@96.046,34.611 ; 95.301,34.595 cw(c95.682,34.214) v13@96.046,34.611 ; 95.301,34.595 cw(c95.682,34.214) v13@96.046,34.611